# Altium PCB SWMD_21DK LV_DR_Brush_V1.0.PcbDoc
Units mil, origin at the board's own origin, x right, y up, seen from the top; angles counter-clockwise.
Board outline 4317.55 x 587.56 mil, 2 copper layers (Top, Bottom); 94 components, 64 nets, 295 pads, 188 vias.
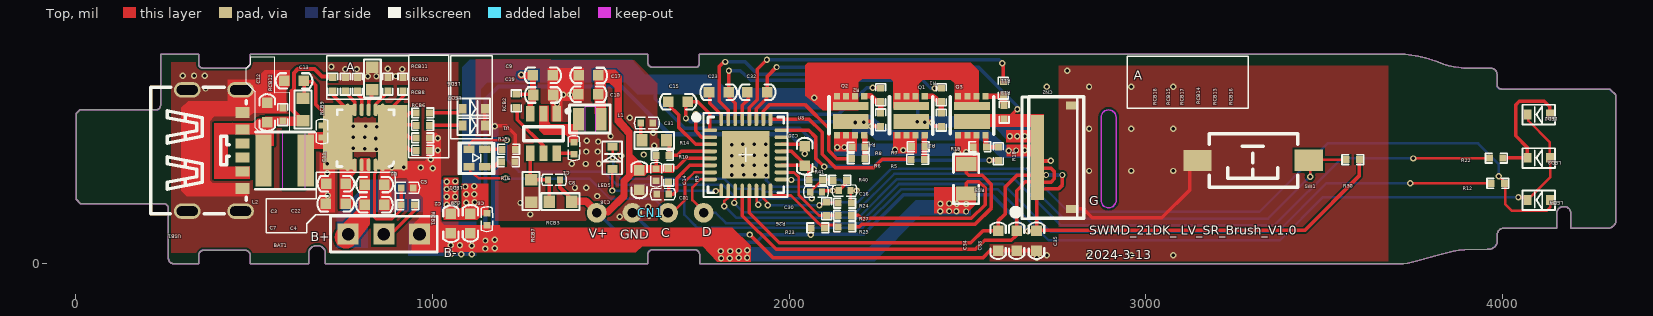
[diagram p0: Top view]
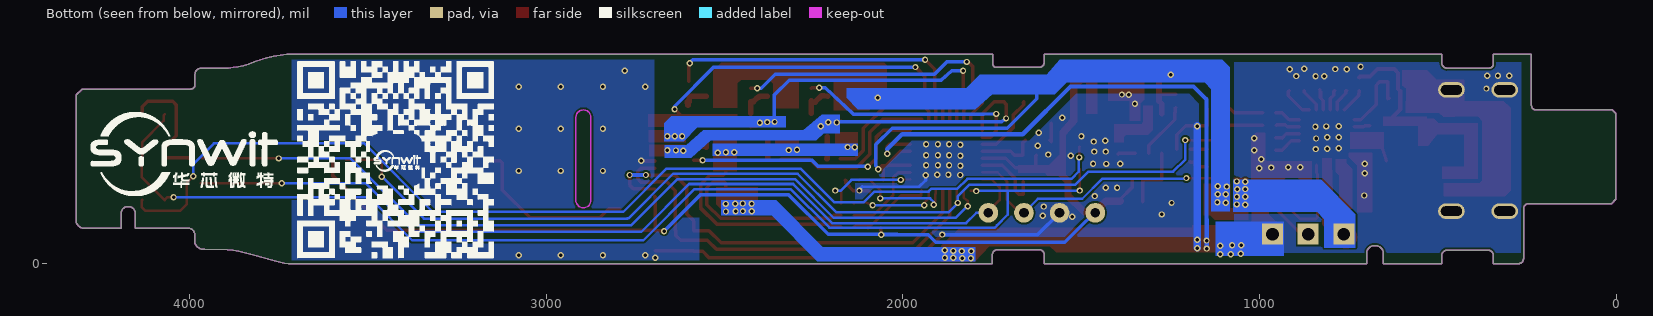
[diagram p1: Bottom view, seen from below]

## Layer stack, top to bottom
Solder Mask Top: solder mask 0.4, Solder Resist, Dk 3.5
Top: signal copper 1.4
Dielectric 1: dielectric 12.6, FR-4, Dk 4.8
Bottom: signal copper 1.4
Solder Mask Bottom: solder mask 0.4, Solder Resist, Dk 3.5

## Board outline
259.7,12.96 ccw(c274.21,12.96) 274.21,-1.55 344.28,-1.55 344.28,21.65 cw(c359.31,21.65) 359.31,36.68 472.81,36.68 cw(c472.81,19.79) 489.7,19.79 489.7,-1.55 653.45,-1.55 653.45,32.93 cw(c676.47,25.23) 699.49,32.93 699.49,-1.55 1603.35,-1.55 1603.35,22.41 cw(c1618.89,22.38) 1618.87,37.93 1734.39,37.93 cw(c1734.39,23.03) 1749.28,23.03 1749.28,-1.6 3711.58,-1.6 3711.51,-1.6 ccw(c3709.83,158.67) 3757.83,5.74 3829.49,25.32 3829.45,25.31 cw(c3926.17,-299.15) 3895.53,38.03 3958.66,39.08 3958.67,39.07 ccw(c3961.85,63.92) 3986.57,59.91 3986.58,81.37 cw(c4002.83,81.37) 4002.83,97.62 4153.24,97.62 4153.24,143.03 cw(c4172.93,138.7) 4192.62,143.03 4192.62,97.41 4297.41,97.41 4297.4,97.41 ccw(c4295.09,121.78) 4318.61,114.96 4318.61,471.84 4302.1,488.35 3997.9,488.35 cw(c3997.9,500.72) 3985.53,500.72 3985.53,530.19 ccw(c3969.35,530.19) 3969.35,546.37 3906.78,546.37 3906.8,546.37 cw(c3914.23,812.44) 3835.95,558.03 3835.91,558.05 ccw(c3695.54,238.28) 3728.45,585.95 1748.45,585.95 1748.45,560.05 cw(c1737.26,560.05) 1737.26,548.87 1618.26,548.87 cw(c1618.26,563.26) 1603.87,563.26 1603.87,585.85 489.28,585.85 489.28,562.79 cw(c473.28,562.79) 473.28,546.78 356.18,546.78 cw(c356.18,558.68) 344.28,558.68 344.28,585.95 237.41,585.95 237.41,442.2 cw(c225.33,442.2) 225.33,430.12 11.31,430.12 1.05,419.86 1.05,178.97 12.83,167.2 245.46,167.2 cw(c245.46,152.96) 259.7,152.96

## Design rules (kind name [scope] priority, off if disabled: settings)
Clearance "Clearance - Default - DEFAULT- SMD" [IsVia vs IsSMTPin] p1: gap=0 ignorepadtopadclearanceinfootprint=FALSE
Clearance "Clearance - Default - DEFAULT - Via" [IsVia vs IsVia] p2: gap=0 ignorepadtopadclearanceinfootprint=FALSE
Clearance "Clearance - Default - DEFAULT - Net" [All] p3: gap=5.51 ignorepadtopadclearanceinfootprint=FALSE except(0: Arc-Hole Track-Hole SMDPad-Hole THPad-Hole Via-Hole Fill-Hole Poly-Hole Region-Hole Text-Hole; 10: Text-Text)
ComponentClearance "ComponentClearance - Default - DEFAULT" [All] p1: gap=5.91 collisioncheckmode=3 verticalgap=10 showdistances=FALSE
FanoutControl Fanout_Small [(CompPinCount < 5)] p3: bgadir=Out bgaviamode=Centered fanoutstyle=Auto fanoutdirection=OutThenIn viagrid=1 // Fanout_Small (Default Rule)
FanoutControl Fanout_SOIC [IsSOIC] p4: bgadir=Out bgaviamode=Centered fanoutstyle=Auto fanoutdirection=Alternating viagrid=1 // Fanout_SOIC (Default Rule)
HoleToHoleClearance "HoleToHoleClearance - Default - DEFAULT" [All] p1: gap=5.91 allowstackedmicrovias=TRUE
Length "Default Length" [All] p1: maxlimit=50000 minlimit=0
MaxMinImpedance "Default Impedance" [All] p1: minimum=50.00 maximum=150.0
ParallelSegment "Default Parallel Segment Adjasent" [All] p1: limit=1000 gap=200
ParallelSegment "Default Parallel Segment Same Layer" [All] p2: limit=1000 gap=200
PlaneConnect "Default PlaneConnect" [All] p1: planeconnectstyle=Direct reliefexpansion=20 reliefentries=4 reliefconductorwidth=15 reliefairgap=10
PolygonConnect "PolygonConnect - Default SMT" [IsSMTPin] p1: connectstyle=Direct reliefconductorwidth=10 reliefentries=4 polygonreliefangle="45 Angle" airgapwidth=10
PolygonConnect "PolygonConnect - Default Pad" [All] p2: connectstyle=Direct reliefconductorwidth=15 reliefentries=4 polygonreliefangle="45 Angle" airgapwidth=10
RoomDefinition "Room: D76609048" [All vs False] p1: confinementstyle=ConfineOut formatcopy=TRUE lockcomponents=FALSE outline 2915.2,416 ccw(c2916.52,416.72) 2917.84,417.42 ccw(c2896.1,405.52) 2874.37,417.44 ccw(c2875.69,416.72) 2876.99,415.98 cw(c2896.1,405.52) 2915.2,415.99
RoomDefinition "Room: D53874403" [All vs False] p2: confinementstyle=ConfineOut formatcopy=TRUE lockcomponents=FALSE outline 2876.94,169.2 ccw(c2875.68,168.38) 2874.43,167.56 ccw(c2896.1,181.69) 2917.77,167.56 ccw(c2916.52,168.38) 2915.26,169.2 cw(c2896.1,181.69) 2876.94,169.2
RoomDefinition "Room: D33575189" [All vs False] p3: confinementstyle=ConfineOut formatcopy=TRUE lockcomponents=FALSE outline 2874.18,168.38 ccw(c2875.68,168.38) 2877.18,168.38 2877.18,416.72 ccw(c2875.68,416.72) 2874.18,416.72 2874.18,168.38
RoomDefinition "Room: D1997251" [All vs False] p4: confinementstyle=ConfineOut formatcopy=TRUE lockcomponents=FALSE outline 2915.02,168.38 ccw(c2916.52,168.38) 2918.02,168.38 2918.02,416.72 ccw(c2916.52,416.72) 2915.02,416.72 2915.02,168.38
RoutingLayers "RoutingLayers - Default - DEFAULT" [All] p1: top layer_v5=TRUE bottom layer_v5=TRUE
RoutingPriority "RoutingPriority - Default - DEFAULT" [All] p1: routingpriority=3
RoutingTopology "Default Routing Topology" [All] p1: topology=Shortest
RoutingVias "RoutingVias - Default - DEFAULT" [All] p1: holewidth=9.84 width=17.72 viastyle="Through Hole" minholewidth=9.84 minwidth=17.72 maxholewidth=9.84 maxwidth=17.72
SMDToCorner "SMDToCorner - Default - DEFAULT" [All] p1: distance=0
SolderMaskExpansion [All] p1: expansion=4 istentingtop=FALSE
Width "Default Width" [All] p1: maxlimit=78.74 minlimit=6 preferedwidth=9.84
22 further rules are at their usual default settings.

## Components (designator, comment, footprint, x,y, rotation, side; value= is the part's Value field where it differs from the comment)
BAT1 "HDR1X3" HDR1X3 963.76,81.44 r180 top
C1 "C0402" C0402 1396.85,322.44 r270 top
C01 "C0402" C0402 1646.06,193.7 r0 top
C2 "C0603" C0603 1051.97,111.02 r90 top
C3 "C0603" C0603 729.53,222.83 r0 top
C4 "C0603" C0603 837.4,163.39 r180 top
C5 "C0402" C0402 929.13,211.42 r0 top
C6 "C0402" C0402 1152.76,123.23 r270 top
C7 "C0603" C0603 728.74,166.93 r0 top
C8 "C0402" C0402 1340.94,233.86 r180 top
C9 "C0603" C0603 1309.45,526.77 r0 top
C10 "C0603" C0603 1437.01,473.62 r180 top
C11 "C0402" C0402 690.55,369.29 r270 top
C12 "C0603" C0603 536.61,422.44 r90 top
C13 "C0603" C0603 611.81,511.02 r180 top
C14 "C0402" C0402 1627.56,248.03 r270 top
C15 "C0603" C0603 1688.98,452.36 r0 top
C16 "C0402" C0402 2155.91,203.54 r0 top
C17 "C0603" C0603 1438.06,526.35 r180 top
C18 "C0603" C0603 1580.19,233.44 r270 top
C19 "C0603" C0603 1310.9,471.63 r0 top
C20 "C0603" C0603 2043.97,300.37 r90 top
C22 "C0603" C0603 837.8,220.47 r0 top
C23 "C0603" C0603 1803.15,479.13 r0 top
C29 "C0603" C0603 1106.69,111.42 r270 top
C30 "C0402" C0402 2075.98,200 r180 top
C31 "C0402" C0402 1601.18,392.91 r180 top
C32 "C0603" C0603 1911.02,479.53 r0 top
C33 "C0603" C0603 2638.19,62.99 r270 top
C34 "C0603" C0603 2586.22,62.99 r270 top
C35 "C0603" C0603 2694.09,62.99 r270 top
CN1 "XH2.54-SMD4P" XH2.54-SMD4P 1610.77,141.34 r0 top
CN2 "SMD-12" SMD-12 2696.85,404.61 r270 top
L1 "L1206A" L1206A 1409.52,403.11 r0 top
L2 "L1206" L1206 526.3,287.84 r0 top
LED1 "LED0402-4" LED0402-4 1146.77,271 r90 top
LED2 "LED0402" LED0402 4122.05,417.32 r90 top
LED3 "LED0402" LED0402 4122.1,295.5 r90 top
LED4 "LED0402" LED0402 4122.05,177.17 r90 top
LED5 "LED0402" LED0402 1504.9,275.59 r0 top
LED6 "LED0402" LED0402 1096.06,433.07 r270 top
LED7 "LED0402" LED0402 1096.06,385.83 r270 top
Q1 "DFN-3X3_8" DFN-3X3_8 2380.71,468.5 r180 top
Q2 "DFN-3X3_8" DFN-3X3_8 2211.02,468.5 r180 top
Q3 "DFN-3X3_8" DFN-3X3_8 2551.3,468.5 r180 top
R1 "LC-0402_R" LC-0402_R 2427.17,472.05 r270 top
R2 "LC-0402_R" LC-0402_R 2256.69,472.05 r270 top
R3 "LC-0402_R" LC-0402_R 2427.17,401.57 r90 top
R4 "LC-0402_R" LC-0402_R 2257.09,401.57 r270 top
R5 "LC-0402_R" LC-0402_R 2360.91,291.27 r0 top
R6 "LC-0402_R" LC-0402_R 2194.77,293.16 r0 top
R7 "LC-0402_R" LC-0402_R 2362.2,326.77 r0 top
R8 "LC-0402_R" LC-0402_R 2194.88,325.59 r0 top
R9 "LC-0402_R" LC-0402_R 1662.6,246.85 r270 top
R10 "LC-0402_R" LC-0402_R 1645.28,301.97 r0 top
R11 "LC-0402_R" LC-0402_R 2600.89,490.79 r270 top
R12 "LC-0402_R" LC-0402_R 3987.8,223.62 r180 top
R13 "LC-0402_R" LC-0402_R 2603.02,423.62 r90 top
R14 "0603-R" 0603-R 1656.69,344.49 r180 top
R15 "LC-0402_R" LC-0402_R 1213.78,319.29 r0 top
R16 "LC-0402_R" LC-0402_R 1212.99,283.86 r0 top
R18 "LC-0402_R" LC-0402_R 2587.21,307.09 r90 top
R19 "LC-0402_R" LC-0402_R 2535.43,326.43 r0 top
R22 "LC-0402_R" LC-0402_R 3983.46,294.88 r180 top
R23 "LC-0402_R" LC-0402_R 2080.71,98.82 r180 top
R24 "LC-0402_R" LC-0402_R 2156.3,168.5 r0 top
R25 "LC-0402_R" LC-0402_R 2155.91,101.97 r180 top
R26 "LC-0402_R" LC-0402_R 2105.51,152.36 r270 top
R27 "LC-0402_R" LC-0402_R 2155.91,133.86 r180 top
R30 "LC-0402_R" LC-0402_R 3580.89,290.59 r180 top
R40 "LC-0402_R" LC-0402_R 2142.52,232.28 r180 top
R41 "LC-0402_R" LC-0402_R 2074.8,233.46 r180 top
RCB1 "LC-0402_R" LC-0402_R 930.91,163.28 r0 top
RCB2 "LC-0402_R" LC-0402_R 1235.07,455.13 r270 top
RCB3 "0603R" 0603R 1359.06,172.44 r0 top
RCB6 "LC-0402_R" LC-0402_R 972.83,316.54 r0 top
RCB7 "0603R" 0603R 1276.77,202.36 r90 top
RCB8 "LC-0402_R" LC-0402_R 972.83,351.18 r0 top
RCB9 "0603R" 0603R 637.01,431.1 r270 top
RCB10 "LC-0402_R" LC-0402_R 972.44,386.61 r180 top
RCB11 "LC-0402_R" LC-0402_R 972.83,421.26 r180 top
RCB12 "LC-0402_R" LC-0402_R 580.31,416.93 r90 top
RCB13 "LC-0402_R" LC-0402_R 874.8,502.36 r90 top
RCB14 "0603R" 0603R 831.5,518.11 r90 top
RCB15 "LC-0402_R" LC-0402_R 755.91,502.36 r90 top
RCB16 "LC-0402_R" LC-0402_R 917.32,502.36 r90 top
RCB17 "LC-0402_R" LC-0402_R 789.37,502.36 r90 top
RCB18 "LC-0402_R" LC-0402_R 720.47,502.36 r90 top
RS3 "LC-0805_R" LC-0805_R 2496.85,236.22 r90 top
SW1 "SW_SMD-3_6_2.5" SW_SMD-3_6_2.5 3300.2,287.9 r180 top
U1 "LC-SOT-23-6" LC-SOT-23-6 1311.42,363.37 r90 top
U2 "QFN-24" QFN-24 888.29,303.51 r90 top
U3 "QFN32" QFN32 1878.78,303.87 r0 top
USB1 "TYPE-C-SMD_6P" TYPE-C-SMD_6P 389.6,315.9 r270 top

## Footprints (in the part's own frame and the unit in brackets; to place one, negate y for a bottom-side part, rotate by r counter-clockwise, add the part's x,y. Pads: shape width x height; smd on the part's side, far side on the other; paste and mask are expansions set on the pad)
0603-R [mm]
  rect 0.799x0.9 smd: 1(0,0) 2(1.751,0)
  silkscreen extent -0.52,-0.6 2.27,0.6
0603R [mm]
  rect 0.8x0.9 smd: 1(-0.8,0) 2(0.8,0)
  silkscreen extent -1.35,-0.6 1.35,0.6
C0402 [mm]
  rect 0.45x0.5 smd mask+0.076: 1(-0.425,0) 2(0.425,0)
  silkscreen extent -0.88,-0.4 0.88,0.4
C0603 [mm]
  rect 0.75x0.75 smd: 1(-0.7,0) 2(0.7,0)
  silkscreen extent -1.31,-0.55 1.31,0.55
DFN-3X3_8 [mil]
  rect 17x18 smd: 1(0,0) 2(25.59,0) 3(51.18,0) 4(76.77,0) 5(76.77,109.58) 6(51.18,109.58) 7(25.59,109.58) 8(0,109.58)
  rect 100x23 smd: 9(38.33,27.5)
  rect 100x42 smd: 10(38.33,70.83)
  silkscreen extent -23,2 99,106
HDR1X3 [mm]
  rect 1.5x1.5 hole 0.9: 1(0,0) 2(2.54,0) 3(5.08,0)
  silkscreen extent -1.27,-1.27 6.35,1.27
L1206 [mil]
  rect 46x147 smd: 1(0,0) 2(117.92,0)
  silkscreen extent -23,-80 143,80
L1206A [mm]
  rect 0.8x1.6 smd: 1(0,0) 2(1.6,0)
  silkscreen extent -0.63,-0.97 2.26,1.04
LC-0402_R [mm]
  rect 0.5x0.5 smd mask+0.126: 1(-0.48,0) 2(0.48,0)
  silkscreen extent -0.78,-0.35 0.77,0.35
LC-0805_R [mm]
  rect 1x1.47 smd: 1(-1.05,0) 2(1.05,0)
  silkscreen extent -1.77,-0.9 1.77,0.9
LC-SOT-23-6 [mm]
  rect 1.1x0.6 smd: 1(1.4,-0.95) 2(1.4,0) 3(1.4,0.95) 4(-1.4,0.95) 5(-1.4,0) 6(-1.4,-0.95)
  silkscreen extent -0.5,-1.87 1.72,1.4
LED0402 [mm]
  rect 0.7x0.55 smd: 1(0,-0.3) 2(0,1.3)
  silkscreen extent -0.72,-0.66 0.68,1.66
LED0402-4 [mil]
  rect 21x32 smd: 1(0,0) 2(48.33,0) 3(48.33,44.17) 4(0,44.17)
  silkscreen extent -20,-26 65,68
QFN32 [mm]
  oval 1x0.28 smd: 1(-2.55,1.75) 2(-2.55,1.25) 3(-2.55,0.75) 4(-2.55,0.25) 5(-2.55,-0.25) 6(-2.55,-0.75) 7(-2.55,-1.25) 8(-2.55,-1.75) 17(2.55,-1.75) 18(2.55,-1.25) 19(2.55,-0.75) 20(2.55,-0.25) 21(2.55,0.25) 22(2.55,0.75) 23(2.55,1.25) 24(2.55,1.75)
  oval 0.28x1 smd: 9(-1.75,-2.55) 10(-1.25,-2.55) 11(-0.75,-2.55) 12(-0.25,-2.55) 13(0.25,-2.55) 14(0.75,-2.55) 15(1.25,-2.55) 16(1.75,-2.55) 25(1.75,2.55) 26(1.25,2.55) 27(0.75,2.55) 28(0.25,2.55) 29(-0.25,2.55) 30(-0.75,2.55) 31(-1.25,2.55) 32(-1.75,2.55)
  rect 3.4x3.4 smd: 33(0,0)
  silkscreen extent -3.64,-3 2.97,2.97
QFN-24 [mil]
  rect 83x83 smd: 0(49.21,77.13) 1(0,0) 2(19.69,0) 3(39.37,0) 4(59.06,0) 5(78.74,0) 6(98.43,0) 13(98.43,154.26) 14(78.74,154.26) 15(59.06,154.26) 16(39.37,154.26) 17(19.69,154.26) 18(0,154.26)
  oval 35x12 smd: 7(126.34,27.92) 8(126.34,47.6) 9(126.34,67.29) 10(126.34,86.97) 11(126.34,106.66) 19(-27.92,126.34) 20(-27.92,106.66) 21(-27.92,86.97) 22(-27.92,67.29) 23(-27.92,47.6) 24(-27.92,27.92)
  oval 35x12.01 smd: 12(126.34,126.34)
  silkscreen extent -32,-4 127,155
SMD-12 [mil]
  rect 22x36 smd: 0(252.38,97.5) 0/2(-37.62,97.5) 1(216.54,0) 2(196.85,0) 3(177.17,0) 4(157.48,0) 5(137.8,0) 6(118.11,0) 7(98.43,0) 8(78.74,0) 9(59.06,0) 10(39.37,0) 11(19.68,0) 12(0,0)
  silkscreen extent -62,-25 279,130
SW_SMD-3_6_2.5 [mm]
  rect 2x1.5 smd: 1(-3.996,-0.02) 2(3.937,0)
  silkscreen extent -3.21,-1.9 3.09,1.9
TYPE-C-SMD_6P [mm]
  oval 1.1x1.9 hole 0.686 slot 1.499 at 90 deg: 7(-4.32,-1.963) 7/2(4.32,-1.963) 7/3(-4.32,1.838) 7/4(4.32,1.838)
  rect 0.7x1 smd paste-0.487 mask+0.051: A5(-0.5,1.963) A9(1.5,1.963) B5(0.5,1.963) B9(-1.5,1.963)
  rect 0.8x1 smd paste-0.487 mask+0.051: A12(2.7,1.963) B12(-2.7,1.963)
  silkscreen extent -4.5,-4.56 4.5,2.24
XH2.54-SMD4P [mm]
  round 1.4 hole 0.7: 1(-3.81,0) 2(-1.27,0) 3(1.27,0) 4(3.81,0)

## Via types
v1: diameter 17.72, hole 9.84, Top to Bottom, 188 vias

## Nets (pads, with @x,y where several pads share a name; then routed paths per layer and width w, separated by ;. In a path a pad name is that pad's centre, name@x,y a point inside that pad or via, vN(x,y) a via of type N, cw(c..) or ccw(c..) an arc to the next point about the centre after c; other vN are vias at no path point)
3V3: C8.1 C10.1 C14.1 C17.1 C18.1 C35.1 CN1.1 CN2.1 L1.2 R9.1 R10.1 R23.2 R30.1 RCB3.2 U3.5 | length 3105.3
  Top w9.84: C8.1 1357.68,212.2 1390.55,179.33 1390.55,173.62 RCB3.2 ; CN1.1 CN1.1@1460.77,144.09 ; R10.1 1627.56,300.79 C14.1 ; R9.1 1664.57,267.72 1685.43,267.72 1711.75,294.03 U3.5 ; v1(2061.42,79.92) R23.2 ; v1(2670.08,89.76) 2670.87,90.55 C35.1 ; CN2.1 2694.09,185.32 C35.1 ; R30.1 3599.79,245.67 3445.85,91.73 2695.28,91.73 C35.1
  Top w19.68: RCB3.2@1390.55,173.62 1431.24,173.62 1460.77,144.09 1492.91,144.09 1537.8,188.98 1537.8,230.71 1568.08,261 C18.1
  Bottom w9.84: CN1.1 1491.88,113.6 1546.43,59.06 1908.32,59.06 1929.19,79.92 v1(2061.42,79.92) 2015.55,80.71 2209.45,80.71 2320.08,191.34 2568.5,191.34 v1(2670.08,89.76)
12V: BAT1.3 C2.2 C4.2 C6.1 C9.1 C19.1 C20.1 C22.1 C29.1 Q1.2 Q1.3 Q1.4 Q1.9 Q2.2 Q2.3 Q2.4 Q2.9 Q3.2 Q3.3 Q3.4 Q3.9 R41.2 RCB2.1 U1.3 U2.21 U2.22 U3.19 U3.21 | length 1034.4
  Top w9.84: RCB2.1 1280.94,474.03 1281.89,473.07 C19.1 ; C19.1@1281.89,463.4 C19.1@1281.89,468.11 ; U3.19 2042.43,274.34 C20.1 ; U3.21 2007.15,313.71 2043.97,276.9 C20.1 ; R41.2 2055.91,266.14 C20.1@2049.24,272.81 ; v1(2069.69,262.99) 2059.87,272.81 C20.1@2049.24,272.81 ; 2069.69,509.84 2070.87,511.02 ; C20.1 C20.1@2049.24,272.81
  Top w15.75: U1.3 1274.02,446.46 1281.89,454.33 C19.1@1281.89,463.4 ; C19.1@1281.89,468.11 1281.89,473.07 C9.1
  Top w19.68: v1@1248.03,526.77 C9.1
  Bottom w9.84: 1625.2,500.79 1625.2,461.42 1707.87,378.74 2029.92,378.74 2075.98,332.68 2075.98,272.83 2069.69,266.54 v1(2069.69,262.99)
  Bottom w19.68: v1@1248.03,526.77 v1@1248.03,527.56
  other v1: 1040.16,163.39 1064.17,164.57 1095.28,169.29 1118.11,170.87 1040.16,186.22 1063.39,186.61 1094.49,193.31 1117.72,192.91 1062.99,207.09 1039.76,207.87 1092.13,214.96 1117.72,215.75 1040.16,228.74 1064.17,229.13 2070.87,464.17 1248.82,528.35
$$$1: BAT1.2 RCB1.2 | length 131.6
  Top w9.84: BAT1.2 883.07,81.44 953.21,151.57 953.21,159.88 RCB1.2
$$$2: C11.1 U2.14 | length 45
  Top w9.84: C11.1 703.54,386.02 707.28,382.28 733.99,382.28 U2.14
$$$3: RCB16.1 U2.7 | length 90.2
  Top w9.84: U2.7 877.56,429.85 878.02,430.31 880.31,430.31 919.29,469.29 919.29,481.5 RCB16.1
$$$4: RCB13.1 U2.8 | length 67.9
  Top w9.84: U2.8 840.68,446.06 874.8,479.53 RCB13.1
$$$5: RCB14.1 U2.9 | length 60.6
  Top w9.84: U2.9 821,455.51 829.13,463.65 829.13,481.1 RCB14.1
$$$6: RCB17.1 U2.10 | length 58.8
  Top w9.84: RCB17.1 791.73,481.89 791.73,471.39 801.31,461.81 U2.10
$$$7: RCB15.1 U2.11 | length 65.3
  Top w9.84: RCB15.1 758.4,482.94 758.4,476.38 781.63,453.15 U2.11
$$$8: RCB11.2 U2.6 | length 73.7
  Top w9.84: U2.6 917.32,401.93 936.65,421.26 RCB11.2
$$$9: RCB6.1 U2.3 | length 76.6
  Top w9.84: U2.3 911.02,342.88 937.01,316.89 953.58,316.89 RCB6.1
$$$10: RCB8.1 U2.4 | length 71
  Top w9.84: U2.4 924.8,362.56 937.01,350.36 937.83,351.18 RCB8.1
$$$15: LED6.1 RCB11.1 | length 97.4
  Top w9.84: RCB11.1 1070.11,421.26 1080.58,431.73 1083.03,431.73 LED6.1
$$$16: C11.2 L2.2 U2.15 U2.16 U2.17 | length 74.7
  Top w9.84: L2.2 667.84,358.66
$$$17: C3.2 C7.2 U2.19 U2.20
$$$18: C5.1 RCB1.1 U2.23 | length 301
  Top w7.87: U2.23 840.68,253.54 837.4,250.26 837.4,128.35 842.13,123.62 885.83,123.62 910.24,148.03 910.24,164.76 RCB1.1@912.02,166.54
  Top w9.84: RCB1.1 912.02,166.54 912.02,211.03 C5.1
$$$19: C13.1 RCB9.1 U2.13 | length 220.6
  Top w9.84: RCB9.1 638.58,462.6 640.16,461.02 640.16,508.27 663.78,508.27 673.23,498.82 673.23,444.85 716.14,401.93 U2.13
$$$20: RCB18.1 U2.12 | length 70.5
  Top w9.84: RCB18.1 721.29,470.5 U2.12
$$$25: LED7.1 RCB10.1 | length 93.2
  Top w9.84: RCB10.1 1083.46,386.61 LED7.1
$$$26: RCB10.2 U2.5 | length 68.7
  Top w9.84: U2.5 922.05,382.25 928.38,388.58 951.57,388.58 RCB10.2
$$$27: C1.1 L1.1 U1.2
$$$28: C1.2 U1.6 | length 49.1
  Top w9.84: U1.6 1394.31,308.25 C1.2
$$$29: RCB2.2 U1.5 | length 159.6
  Top w9.84: RCB2.2 1237.14,434.16 1237.14,422.83 1237.72,422.26 1237.72,402.55 1311.42,328.85 U1.5
$$$32: Q1.8 R5.2 R7.2 | length 68
  Top w15.75: R5.2 2379.8,358.02 Q1.8
$$$33: Q1.1 R1.2 R3.2 | length 84.5
  Top w15.75: Q1.1 2394.65,468.54 cw(c2394.71,446.33) 2410.41,462.03 2419.01,453.43 2420.88,453.43 R1.2 2427.33,420.71 R3.2
$$$34: Q2.1 R2.2 R4.1 | length 89.3
  Top w15.75: Q2.1 2221.74,469.5 2228.53,469.5 2246.46,451.57 R2.2@2257.04,451.57 ; R2.2 2257.04,454.67 R2.2@2257.04,451.57 ; R4.1 R2.2@2257.04,451.57
$$$35: Q2.8 R6.2 R8.2 | length 62.3
  Top w15.75: Q2.8@2212.6,354.4 2212.6,293.16 R6.2
$$$36: Q3.1 R11.2 R13.2 | length 79.4
  Top w15.75: Q3.1 2599.61,468.5 2599.61,452.94 2604.59,452.94 R13.2
$$$37: Q3.8 R18.2 R19.2 | length 73.5
  Top w11.81: R19.2 2551.3,324.81 2554.38,324.91 R18.2
  Top w15.75: R19.2@2551.3,324.81 Q3.8
$$$41: LED2.1 LED3.2 R22.1 | length 359.2
  Top w9.84: R22.1 4002.98,295.5 LED3.2 4070.92,324.02 4037.8,357.14 4037.8,443.7 4048.43,454.33 4118.5,454.33 4133.86,438.98 LED2.1
$$$6693: C8.2 RCB3.1 RCB7.2 U1.4 | length 187.9
  Top w9.84: U1.4 1274.02,233.46 1274.41,233.86 C8.2 1327.56,230.51 RCB3.1
$$$7682: R10.2 R14.1 U3.4 | length 165.4
  Top w9.84: R14.1 1664.17,338.98 R10.2 1686.22,301.97 1697.97,313.71 U3.4
$$$7757: C31.2 R14.2 | length 56.4
  Top w9.84: C31.2 1584.45,341.17 R14.2
$$$15432: LED1.2 R15.1 | length 48.1
  Top w9.84: LED1.2 1194.84,319.33 R15.1
$$$15550: LED1.1 R16.1 | length 52.7
  Top w9.84: LED1.1 1174.02,271 1186.61,283.6 1193.83,283.6 R16.1
$$$27947: LED4.1 LED5.2 R12.1 | length 3062
  Top w7.09: LED5.2 1505.51,326.16 v1(1505.51,296.46) ; v1(3990.16,243.7) 4006.69,227.17 R12.1 4008.27,222.05 4008.27,165.35 4026.38,147.24 4125.2,147.24 4135.43,157.48 4135.43,175.59 LED4.1
  Bottom w7.09: v1(1505.51,296.46) 1507.09,294.88 1507.09,257.09 1527.56,236.61 1819.69,236.61 1848.03,208.27 1920.87,208.27 1928.35,200.79 2079.92,200.79 2110.24,170.47 2192.13,170.47 2287.01,265.35 2662.99,265.35 2784.25,144.09 3318.9,144.09 3510.63,335.83 3932.68,335.83 3990.16,278.35 v1(3990.16,243.7)
BST1: C15.1 U3.3 | length 191.6
  Top w9.84: C15.1 1662.42,450.04 1661.42,449.04 1661.42,444.49 1690.12,415.78 1690.12,381.46 1738.19,333.4 U3.3
BST2: C23.1 U3.32 | length 89.1
  Top w9.84: C23.1 1777.95,476.77 1777.95,448.46 1809.88,416.54 U3.32
BST3: C32.1 U3.29 | length 82.6
  Top w9.84: U3.29 1868.94,442.91 1885.04,459.02 1885.04,477.95 C32.1
BUTTON: LED1.3 R30.2 SW1.1 U3.11 | length 2841.8
  Top w7.09: LED1.3 1103.05,319.33 1103.88,318.5 1103.88,334.59 1114.57,345.28 v1(1208.27,345.28) ; v1(1846.06,168.9) 1846.06,175.58 1849.21,179.52 1849.21,200.45 U3.11 ; v1(3461.42,242.52) 3461.42,284.78 SW1.1 3459.42,290.59 R30.2
  Bottom w7.09: v1(1208.27,345.28) 1208.27,290.94 1242.52,256.69 1480.31,256.69 1516.54,220.47 1813.39,220.47 1846.06,187.8 v1(1846.06,168.9) 1872.83,142.13 2186.61,142.13 2295.28,250.79 2644.49,250.79 2769.69,125.59 2773.23,125.59 2773.62,125.2 3343.31,125.2 3461.02,242.91 3461.22,243.11 3461.42,242.91 v1(3461.42,242.52)
COM: Q1.5 Q1.6 Q1.7 Q2.5 Q2.6 Q2.7 Q3.5 Q3.6 Q3.7 R7.1 R8.1 R19.1 R25.1 RS3.2 | length 588.9
  Top w9.84: R25.1 2196.85,101.97 2203.54,108.66 2521.65,108.66 2567.72,154.72 2567.72,220.08 2541.73,246.06 2504.33,246.06 2496.85,253.54 RS3.2
  other v1: 2519.69,309.84 2473.62,311.42 2496.46,310.63 2320.08,317.32 2297.24,318.11 2135.04,324.8 2155.51,325.59
DC-ADC: C30.2 R40.2 R41.1 U3.14 | length 304.7
  Top w7.09: U3.14 1907.48,202.65 1907.48,194.88 1909.8,192.57 1909.8,171.99 1912.34,169.44 1912.34,167.61 1913.39,166.57 v1(1913.39,163.78) ; v1(2063.78,181.5) 2063.78,198.23 C30.2 2092.72,233.46 2122.44,233.46 R40.2
  Bottom w7.09: v1(1913.39,163.78) 1913.77,164.07 1913.77,171.25 1924.02,181.5 v1(2063.78,181.5)
GND: BAT1.1 C01.1 C2.1 C3.1 C4.1 C5.2 C6.2 C7.1 C9.2 C10.2 C12.2 C13.2 C14.2 C16.1 C17.2 C18.2 C19.2 C20.2 C22.2 C29.2 C30.1 C31.1 C33.2 C34.2 C35.2 CN1.2 CN2.0 CN2.0/2 CN2.6 LED6.2 LED7.2 R15.2 R16.2 R27.1 R40.1 RCB6.2 RCB7.1 RCB8.2 RCB12.2 RCB13.2 RCB14.2 RCB15.2 RCB16.2 RCB17.2 RS3.1 SW1.2 U1.1 U2.0 U2.18 U2.24 U3.22 U3.33 USB1.7 USB1.7/2 USB1.7/3 USB1.7/4 USB1.A12 USB1.B12 | length 4626.4
  Top w9.84: LED6.2 LED7.2 1207.09,385.83 1232.68,360.24 R15.2 ; v1(1890.16,80.31) 1955.12,15.35 2544.09,15.35 2561.81,33.07 2587.4,33.07 2587.99,33.66 2589.76,35.43 C33.2 C35.2 ; v1(1936.61,246.46) U3.33@1938.98,246.46 ; U3.22 2038.49,333.4 C20.2 2044.09,327.8 v1(2044.09,307.09) ; C30.1 2096.26,203.54 v1(2122.05,203.54) C16.1 2159.84,224.21 2159.84,230.71 R40.1 ; R27.1 2194.49,133.86 2202.76,125.59 2511.42,125.59 2550,164.17 2550,211.02 2532.28,228.74 2501.97,228.74 2497.24,224.02 RS3.1@2497.24,198.82 ; CN2.6 2735.71,286.5 v1@2735.83,286.61 ; CN2.0 2825.59,152.23 2850.66,127.17 3045.67,127.17 3123.62,205.12 3123.62,281.1 3130.42,287.9 SW1.2
  Bottom w7.87: 1936.61,232.28 1954.72,214.17 2114.17,214.17
  Bottom w9.84: CN1.2 1621.79,80.31 v1(1890.16,80.31) ; 1936.61,232.28 v1(1936.61,246.46) ; v1(2044.09,307.09) 2044.09,319.69 ; 2114.17,214.17 2122.05,206.3 v1(2122.05,203.54)
  Bottom w11.81: v1(1148.03,40.94) 1148.03,123.23 1148.82,124.02 ; v1(1148.82,63.39) 1148.82,124.02 ; 2044.09,319.69 2002.36,361.42 1664.17,361.42 1529.92,495.67 1185.04,495.67 1148.82,459.45 1148.82,124.02
  Bottom w19.68: v1(1174.8,42.13) v1(1174.8,65.75) v1@1174.8,385.83
  other v1: 1809.45,13.39 1833.86,13.39 1859.06,14.96 1882.28,15.35 2694.49,14.96 2723.23,22.34 2841.34,22.34 2959.45,22.34 3077.56,22.34 1080.71,24.8 1110.63,24.8 1053.15,25.98 1808.66,33.86 1835.04,33.86 1859.45,34.25 1883.07,36.22 1110.24,48.82 1051.18,50 1077.17,50.39 1525.59,130.31 1607.87,132.68 1274.41,136.61 2496.46,144.88 2424.41,145.67 2448.82,146.06 2469.69,145.67 1605.12,158.66 2496.85,166.14 2424.8,166.93 2449.21,167.32 2470.08,166.93 1246.85,168.9 1461.81,188.19 706.3,189.76 1399.61,211.81 1431.5,211.81 1839.76,247.24 1872.44,247.64 1903.94,247.64 705.12,251.97 2841.34,258.56 2959.45,258.56 3077.56,258.56 1001.18,266.14 967.32,268.11 886.22,269.29 919.69,269.29 1838.98,273.62 1870.87,274.41 1901.97,274.8 1935.43,274.8 1430.31,278.35 704.72,278.74 1390.55,279.13 1466.93,279.13 2734.25,287.4 995.67,291.73 1529.13,301.57 1838.98,301.57 1870.87,302.36 1901.97,302.76 1935.43,302.76 1592.91,304.72 1431.5,312.99 1463.78,312.99 1014.57,316.93 810.24,320.47 842.13,320.08 777.95,322.05 1622.44,329.13 1838.98,332.28 1870.87,333.07 1901.97,333.46 1935.43,333.46 1464.96,340.94 1432.68,343.31 841.73,349.61 1014.57,350.39 778.35,353.54 810.24,353.54 1499.61,356.3 1619.29,365.35 2841.34,376.67 2959.45,376.67 3077.56,376.67 812.6,383.46 843.31,382.68 778.35,383.86 1175.2,384.25 1553.54,407.87 1349.61,447.24 1366.54,472.44 1385.83,472.83 363.78,489.76 2723.23,494.78 2841.34,494.78 2959.45,494.78 3077.56,494.78 818.5,524.41 842.91,524.41 299.61,525.2 331.5,525.2 361.42,525.2 896.85,524.8 2779.92,539.37 755.91,544.09 787.4,544.49 915.75,544.09 874.41,544.88 716.93,550.79
HALLA: C33.1 CN2.3 CN2.5 U3.12 | length 1216.8
  Top w9.84: U3.12 1868.94,133.43 1963.78,38.58 2522.83,38.58 2548.43,64.17 2623.62,64.17 2636.61,77.17 2636.61,88.98 C33.1 2638.19,203.54 2662.6,227.95 2701.85,227.95 CN2.3@2702.36,227.44 ; CN2.3 CN2.3@2702.36,227.44 ; CN2.5 2733.97,266.81 2743.7,257.09 2743.7,236.22 2734.93,227.44 CN2.3@2702.36,227.44
HALLB: C34.1 CN2.2 CN2.4 U3.13 | length 1217.6
  Top w9.84: U3.13 1888.62,140.91 1972.44,57.09 2509.84,57.09 2544.09,91.34 2585.43,91.34 C34.1 2586.22,118.11 2607.09,138.98 2607.09,213.78 2640.44,247.13 CN2.4 v1(2720.87,247.24) ; CN2.2 2719.65,208.01 2755.64,208.01 2766.93,219.29 v1(2766.93,247.24)
  Bottom w9.84: v1(2720.87,247.24) v1(2766.93,247.24)
LED3: LED2.2 LED3.1 LED4.2 LED5.1 U3.9 | length 3271.8
  Top w7.09: v1(1504.72,203.54) 1504.72,257.3 LED5.1 ; v1(1794.88,202.36) 1796,203.48 U3.9 ; v1(4045.67,185.04) 4062.99,185.04 LED4.2 4135.43,241.73 4135.43,293.98 LED3.1 4133.91,338.92 4073.23,399.61 4073.23,414.96 LED2.2
  Bottom w7.09: v1(1504.72,203.54) 1706.69,203.54 ; v1(1794.88,202.36) 1794.88,198.43 1793.38,201.67 1792.52,203.54 1706.69,203.54 ; v1(4045.67,185.04) 3497.24,185.04 3376.38,64.17 2727.95,64.17 2584.25,207.87 2314.96,207.87 2206.69,99.61 1742.13,99.61 1736.81,104.92 1736.81,105.71 1706.69,135.83 1706.69,203.54
LED4: R22.2 U3.10 | length 2386.4
  Top w7.09: v1(1818.11,159.84) 1818.11,174.72 1829.57,183.43 U3.10 ; v1(3750.79,293.7) 3964.57,293.7 R22.2
  Bottom w7.09: v1(1818.11,159.84) 1819.69,159.84 1852.76,126.77 2194.09,126.77 2303.15,235.83 2632.28,235.83 2761.42,106.69 3361.42,106.69 3549.61,293.7 v1(3750.79,293.7)
OC: C16.2 R24.2 U3.17 | length 279.4
  Top w7.09: U3.17 v1(2006.69,233.46) ; C16.2 C16.2@2174.02,203.54 ; R24.2 2173.43,168.5 2172.64,167.72 2172.64,201.97 2173.42,202.76 2174.02,203.35 C16.2@2174.02,203.54 ; v1(2189.76,203.54) C16.2@2174.02,203.54
  Bottom w7.09: v1(2006.69,233.46) 2144.49,233.46 2174.41,203.54 v1(2189.76,203.54)
OPA1+: R23.1 R25.2 U3.16 | length 251.6
  Top w7.87: U3.16 1949.21,193.31 1949.21,189.76 2005.36,189.76 2081.66,113.46 2088.78,106.94 ; R23.1 2097.64,98.82 2088.78,106.94 ; R25.2 2136.22,102.76 2135.14,103.11 2133.85,103.94 2130.84,106.94 2088.78,106.94
OPA1-: R26.2 R27.2 U3.18 | length 237.7
  Top w7.87: U3.18 2013.85,254.66 2027.17,241.34 2027.17,190.94 2084.25,133.86 2096.46,133.86 2096.85,133.46 R26.2 2105.91,133.86 R27.2
OPA1-OUT: R24.1 R26.1 U3.15 | length 251.2
  Top w7.09: U3.15 1927.99,181.85 1935.31,174.69 1940.16,169.92 v1(1940.16,162.2) ; v1(2085.43,162.2) 2105.89,170.31 R26.1@2108.03,171.17 ; R26.1 R26.1@2108.03,171.17 ; R24.1 2137.01,170.08 R26.1@2109.82,171.1 ; R26.1@2108.03,171.17 R26.1@2109.82,171.1 ; R26.1@2108.03,171.17 2109.27,171.65 R26.1@2109.82,171.1
  Bottom w7.09: v1(1940.16,162.2) v1(2085.43,162.2)
RST: C01.2 R9.2 U3.6 | length 203.2
  Top w9.84: R9.2 1662.8,227.76 C01.2 1675.2,193.7 1685.04,203.54 1685.04,237.4 1721.98,274.34 U3.6
SWCLK: CN1.3 LED1.4 U3.7 | length 816.9
  Top w7.09: LED1.4 1105.51,268.09 1105.51,257.09 1129.85,238.58 v1(1205.12,238.58) ; CN1.3 1663.13,136.22 1667.39,136.22 1708.33,177.17 1708.33,228.74 1734.25,254.66 U3.7
  Bottom w7.09: v1(1205.12,238.58) 1206.44,237.26 1440.28,237.26 1497.23,180.71 1621.4,180.71 CN1.3
SWDIO: CN1.4 R12.2 U3.8 | length 2521.4
  Top w7.09: CN1.4 1761.16,144.42 1728.81,176.77 1728.81,212.66 1751.12,234.97 U3.8 ; v1(3742.13,224.41) 3968.5,224.41 R12.2
  Bottom w7.09: CN1.4 1794.09,141.34 1822.83,112.6 2198.82,112.6 2308.27,222.05 2600,222.05 2733.86,88.19 3371.26,88.19 3507.09,224.41 v1(3742.13,224.41)
U: C15.2 CN2.7 CN2.8 Q2.10 R4.2 U3.1 | length 743.9
  Top w9.84: v1(1711.02,405.91) 1711.02,445.29 1713.37,447.64 1715.68,451.09 C15.2 1716.93,452.76 1743.7,452.76 1777.95,418.5 1777.95,373.62 1778.39,373.19 U3.1 ; Q2.10 2225.98,397.67 2241.34,382.32 2256.73,382.32 R4.2
  Bottom w9.84: v1(1711.02,405.91) 1723.23,396.85 v1@2190.94,396.85
  other v1: 2616.14,315.35 2636.61,316.14 2660.63,316.54 2230.71,383.86 2185.43,394.49 2209.84,394.88
U-H: R2.1 U3.2 | length 642.8
  Top w9.84: v1(1738.58,418.5) 1738.58,370.8 1754.72,353.08 U3.2 ; v1(2235.04,491.73) 2255.91,491.73 R2.1
  Bottom w9.84: v1(1738.58,418.5) 1774.02,417.99 2139.29,417.99 2140.15,418.84 2218.5,491.73 v1(2235.04,491.73)
U-L: R6.1 U3.26 | length 377.1
  Top w9.84: U3.26 1927.99,426.34 1946.5,444.84 2044.7,444.84 2111,378.54 2111,316.01 2133.86,293.16 R6.1
V: C23.2 CN2.9 CN2.10 Q1.10 R3.1 U3.30 | length 891.4
  Top w9.84: v1(1831.5,539.37) 1830.71,538.58 C23.2 1830.35,478.78 1830.35,466.93 1849.25,448.03 U3.30 ; Q1.10 2360.63,397.67 2360.63,394.88 Q1.10@2381.5,394.88 ; Q1.10@2383.46,394.88 2383.46,397.67 2396.06,397.67 v1@2400.41,393.32 ; v1(2401.18,394.09) v1@2400.41,393.32 ; R3.1 2425.95,383.89 2409.84,383.89 v1@2400.41,393.32
  Bottom w9.84: v1(1831.5,539.37) 1863.78,539.37 1893.15,513.39 2318.9,513.39 2360.43,471.85 2360.43,396.26 v1(2360.24,396.06) ; v1@2381.5,394.88 2383.46,394.88 2383.46,394.09 v1(2401.18,394.09)
  other v1: 2619.69,355.51 2639.76,355.91 2660.63,355.91 2380.71,395.67
V-H: R1.1 U3.31 | length 816.1
  Top w9.84: v1(1821.26,564.17) 1816.93,564.17 1804.33,551.57 1804.33,454.37 1829.57,429.13 U3.31 ; v1(2408.66,490.94) R1.1
  Bottom w9.84: v1(1821.26,564.17) 1877.17,564.17 1911.81,529.53 2358.66,529.53 2397.24,490.94 v1(2408.66,490.94)
V-L: R5.1 U3.25 | length 497.3
  Top w9.84: U3.25 2055.58,404.27 2092.91,366.93 2092.91,305.51 2131.5,266.93 2236.61,266.93 2261.02,291.34 2341.94,291.34 R5.1
VIN: C12.1 L2.1 RCB9.2 RCB12.1 RCB18.2 USB1.A9 USB1.B9 | length 272.6
  Top w11.81: RCB9.2 605.51,431.1 605.51,482.68 611.42,488.58 611.42,533.46 622.44,544.49 668.9,544.49 690.16,523.23 718.5,523.23 RCB18.2
W: C32.2 CN2.11 CN2.12 Q3.10 R13.1 U3.27 | length 970.2
  Top w9.84: U3.27 1908.31,433.07 1937.4,462.17 1937.4,478.35 C32.2 1938.58,523.62 v1(1964.96,550) ; 2586.61,409.84 2603.02,409.84 2615.75,409.84 ; 2622.83,409.84 2618.9,409.84 ; v1(2640.55,431.5) 2618.9,409.84 ; 2615.75,409.84 2618.9,409.84 ; 2615.75,409.84 2617.32,408.27 2618.9,409.84
  Bottom w9.84: v1(1964.96,550) 2530.71,550 2640.55,440.16 v1(2640.55,431.5)
W-H: R11.1 U3.28 | length 904.5
  Top w9.84: U3.28 1888.62,436.26 1911.02,458.66 1911.02,544.09 1937.4,570.47 v1(1938.19,570.47) ; v1(2597.64,560.63) 2600.89,557.38 R11.1
  Bottom w9.84: v1(1938.19,570.47) 2589.37,570.47 2597.64,563.78 v1(2597.64,560.63)
W-L: R18.1 U3.24 | length 693.9
  Top w9.84: U3.24 2055.51,372.77 2074.41,353.87 2074.41,294.49 v1(2098.82,270.08) ; v1(2562.2,288.98) 2569.29,287.01 2570.48,288.19 R18.1
  Bottom w9.84: v1(2098.82,270.08) 2101.18,272.44 2238.58,272.44 2255.12,288.98 v1(2562.2,288.98)
pads on no net: U2.1 U2.2 U3.20 U3.23 USB1.A5 USB1.B5

## Polygon pours and split planes (outlines as drawn)
GND on Top "Top-GND" (solid, remove dead copper, pour order 6): 1332.28,571.26 1332.28,568.5 1565.75,568.5 1630.31,503.94 1630.31,352.36 1661.81,320.87 1794.49,320.87 1794.49,119.29 1176.38,119.29 1176.38,258.66 1121.65,313.39 1121.65,571.26
GND on Top "Top-GND 1" (solid, remove dead copper, pour order 2): 2757.09,553.15 2757.09,58.66 2563.39,58.66 2563.39,3.94 3680.31,3.94 3680.31,553.15
GND on Top "Top-GND 2" (solid, remove dead copper, pour order 0): 267.72,563.39 1072.05,563.39 1072.05,29.13 267.72,29.13
GND on Bottom "Bottom-GND" (solid, remove dead copper, pour order 10): 2697.64,570.08 2697.64,127.17 2570.87,127.17 2570.87,7.48 3714.57,7.48 3714.57,570.08
GND on Bottom "Bottom-GND 1" (solid, remove dead copper, pour order 8): 266.54,563.39 1070.87,563.39 1070.87,29.13 266.54,29.13
GND on Bottom "Bottom-GND 2" (solid, remove dead copper, pour order 4): 1197.64,475.2 1514.57,475.2 1646.06,343.7 1975.59,343.7 2085.43,233.86 2133.46,233.86 2133.46,74.41 1170.08,74.41 1170.08,447.64

## Keep-outs
Top:
  region: 1428.74,439.37 1456.3,439.37 1456.3,365.75 1428.74,365.75 1428.74,439.37
  region: 578.35,368.5 578.35,208.27 643.31,208.27 643.31,368.5 578.35,368.5
Keep-Out Layer:
  lines w3.94: 2875,176.17 ccw(c2896.3,176.69) 2917.33,173.24 ; 2875,176.18 2875,409.45 cw(c2896.16,408.65) 2917.32,409.47 2917.32,173.23 ; 3711.51,-1.6 ccw(c3709.83,158.67) 3757.77,5.72 ; 3711.58,-1.6 1749.28,-1.6 1749.28,23.03 ccw(c1734.39,23.03) 1734.39,37.93 1618.87,37.93 ccw(c1618.89,22.38) 1603.35,22.41 1603.35,-1.55 699.49,-1.55 699.49,32.93 ccw(c676.47,25.23) 653.45,32.93 653.45,-1.55 489.7,-1.55 489.7,19.79 ccw(c472.81,19.79) 472.81,36.68 359.31,36.68 ccw(c359.31,21.65) 344.28,21.65 344.28,-1.55 274.21,-1.55 cw(c274.21,12.96) 259.7,12.96 259.7,152.96 ccw(c245.46,152.96) 245.46,167.2 12.83,167.2 1.05,178.97 1.05,419.86 11.31,430.12 225.33,430.12 ccw(c225.33,442.2) 237.41,442.2 237.41,585.95 344.28,585.95 344.28,558.68 ccw(c356.18,558.68) 356.18,546.78 473.28,546.78 ccw(c473.28,562.79) 489.28,562.79 489.28,585.85 1603.87,585.85 1603.87,563.26 ccw(c1618.26,563.26) 1618.26,548.87 1737.26,548.87 ccw(c1737.26,560.05) 1748.45,560.05 1748.45,585.95 3728.45,585.95 ; 3728.4,585.95 cw(c3695.54,238.28) 3835.91,558.05 ; 3757.83,5.74 3829.49,25.32 ; 3829.45,25.31 cw(c3926.17,-299.15) 3895.49,38.03 ; 3895.53,38.03 3958.66,39.08 ; 3958.67,39.07 ccw(c3961.85,63.92) 3986.58,59.92 ; 3986.57,59.91 3986.58,81.37 cw(c4002.83,81.37) 4002.83,97.62 4153.24,97.62 4153.24,143.03 cw(c4172.93,138.7) 4192.62,143.03 4192.62,97.41 4297.41,97.41 ccw(c4295.09,121.78) 4318.6,114.95 4318.61,471.84 4302.1,488.35 3997.9,488.35 cw(c3997.9,500.72) 3985.53,500.72 3985.53,530.19 ccw(c3969.35,530.19) 3969.35,546.37 3906.78,546.37 cw(c3914.23,812.44) 3835.96,558.03 ; 3835.95,558.03 3835.95,558.03

## Other copper
Top:
  region net VIN: 530.71,411.02 653.15,411.02 653.15,385.43 530.71,385.43 530.71,411.02
  region net GND: 1120.08,100 1840.55,100 1892.13,48.43 1892.13,4.33 1798.43,4.33 1757.87,47.64 1587.8,47.64 1570.87,30.71 1120.08,30.71 1120.08,100
  region net $$$27: 1299.61,440.94 1299.61,373.23 1312.2,360.63 1374.41,360.63 1381.5,353.54 1381.5,338.58 1407.48,338.58 1407.48,390.16 1331.89,390.16 1325.98,396.06 1325.98,440.94 1299.61,440.94
  region net GND: 1323.62,546.46 1323.62,458.27 1334.65,447.24 1334.65,399.61 1364.17,399.61 1364.17,455.12 1424.41,455.12 1424.41,546.46 1323.62,546.46
  region net 12V: 1031.1,240.16 1031.1,122.44 1126.38,122.44 1138.58,134.65 1157.09,134.65 1157.09,222.05 1082.68,222.05 1082.68,153.54 1072.05,153.54 1072.05,240.16 1031.1,240.16
  region net 3V3: 1454.72,542.91 1454.72,418.9 1486.22,416.93 1486.22,505.91 1496.46,505.91 1510.63,491.73 1510.63,395.27 1544.09,359.05 1544.09,245.28 1595.28,245.28 1603.15,253.15 1676.38,253.15 1676.38,275.2 1591.34,275.2 1560.63,305.91 1560.63,371.29 1530.71,404.76 1530.71,524.02 1512.2,542.52 1485.83,542.52 1485.83,542.91 1454.72,542.91
  region net GND: 853.15,285.83 853.15,146.46 884.25,146.46 884.25,230.71 892.52,238.98 926.38,238.98 934.25,231.1 934.25,205.51 941.73,198.03 959.84,198.03 974.02,183.86 974.02,137.8 941.34,105.12 941.34,31.5 1205.12,31.5 1188.58,106.3 1142.52,106.3 1127.56,105.91 1033.07,105.91 1022.05,116.93 1022.05,223.23 1022.83,222.44 1022.83,353.94 1010.63,366.14 983.86,366.14 983.86,291.34 978.35,285.83 853.15,285.83
  region net GND: 425.59,514.17 503.54,514.17 529.92,540.55 599.21,540.55 599.21,497.64 588.98,488.98 588.98,430.31 425.59,430.31 425.59,514.17
  region net $$$17: 757.09,291.73 757.09,281.1 740.55,264.57 740.55,152.36 776.77,152.36 776.77,245.28 785.83,254.33 785.83,291.73 757.09,291.73
  region net GND: 683.46,309.45 749.21,309.45 749.21,297.24 725.59,273.62 725.59,142.52 683.46,142.52 683.46,309.45
  region net GND: 2407.09,213.39 2523.23,213.39 2523.23,164.96 2498.82,140.55 2407.09,140.55 2407.09,213.39
  region net V: 2609.06,372.44 2712.99,372.44 2712.99,339.37 2609.06,339.37 2609.06,372.44
  region net COM: 2292.13,366.93 2292.13,307.87 2357.87,307.87 2357.87,366.93 2292.13,366.93
  region net $$$16: 652.36,366.54 745.67,366.54 745.67,320.47 652.36,320.47 652.36,366.54
  region net 12V: 823.97,293.53 797.99,293.93 797.24,283.46 793.7,153.54 734.52,94.6 730.04,88.76 726.88,81.13 725.8,72.95 726.88,64.77 730.04,57.14 735.06,50.59 741.61,45.57 749.23,42.41 757.42,41.34 765.6,42.41 773.22,45.57 776.41,48.02 776.4,48.01 812.62,93.68 824.41,108.44 824.41,265.75 823.97,293.53
  region net U: 2610.24,332.68 2711.02,332.68 2711.02,299.21 2610.24,299.21 2610.24,332.68
  region net W: 2465.35,417.72 2714.17,417.72 2714.17,383.07 2465.35,383.07 2465.35,417.72
  region net GND: 451.97,410.63 484.25,410.63 498.03,421.65 589.37,421.65 589.37,454.72 314.57,454.72 295.67,435.83 295.67,202.76 310.63,187.8 483.46,187.8 483.46,224.8 383.46,224.8 375.2,233.07 375.2,398.43 388.58,411.81 451.97,411.81 451.97,410.63
  region net VIN: 388.58,392.52 498.43,392.52 498.43,362.2 425.98,362.2 425.98,269.69 488.19,269.69 488.19,237.01 388.58,237.01 388.58,392.52
  region net COM: 2465.75,367.72 2465.75,258.27 2532.28,258.27 2532.28,367.72 2465.75,367.72
  region net 12V: 2045.28,470.08 2045.28,554.72 2053.15,562.6 2509.84,562.6 2532.68,539.76 2532.68,435.83 2464.17,435.83 2464.17,504.33 2453.94,514.57 2375.2,514.57 2363.39,502.76 2363.39,435.04 2292.13,435.04 2292.13,510.63 2285.04,517.72 2204.72,517.72 2194.09,507.09 2194.09,429.53 2094.49,429.53 2072.44,448.03 2045.28,470.08
  region net COM: 2127.17,367.72 2127.17,314.17 2190.55,314.17 2190.55,367.72 2127.17,367.72
  region net VIN: 438.58,393.31 497.64,392.13 510.24,404.72 555.51,404.72 555.51,329.92 526.38,329.92 501.57,361.81 438.58,361.81 438.58,393.31
Bottom:
  region net GND: 1797.24,45.28 2224.8,45.28 2355.91,176.38 2509.06,176.38 2509.06,133.86 2367.72,133.86 2239.76,5.91 1797.24,5.91 1797.24,45.28
  region net COM: 2126.38,334.25 2533.86,334.25 2533.86,300.79 2126.38,300.79 2126.38,334.25
  region net GND: 931.89,116.14 1122.44,116.14 1122.44,20.87 931.89,20.87 931.89,116.14
  region net 12V: 1084.25,146.06 1084.25,550 1104.72,570.47 1560.98,570.47 1597.24,528.74 1785.04,528.74 1822.83,490.94 2158.27,490.94 2158.27,463.39 2127.17,432.28 1798.03,432.28 1749.21,473.62 1574.41,473.62 1541.34,507.09 1154.33,507.09 1135.04,487.8 1135.04,146.06 1084.25,146.06
  region net 12V: 731.1,43.7 731.1,137.8 827.17,233.86 1073.62,233.86 1073.62,143.7 838.58,143.7 818.5,123.62 818.5,43.7 731.1,43.7
  region net U: 2176.77,416.54 2228.35,416.54 2280.31,372.05 2560.76,372.05 2607.62,331.1 2667.72,331.1 2667.72,295.28 2593.31,295.28 2538.98,344.88 2243.7,344.88 2222.83,365.03 2176.77,364.88 2176.77,416.54
  region net V: 2329.13,411.81 2650,411.81 2668.9,392.91 2668.9,342.13 2614.57,342.13 2576.77,381.1 2329.13,381.1 2329.13,411.81

## Silkscreen, mask and mechanical layers (free items; w line width, h text height)
Silkscreen Top:
  circle w30: c2635.68,142.97 r2.92
  lines w1.97: 2666.54,266.93 2667.72,267.72 ; 478.35,505.91 503.15,481.1 503.15,379.92 514.57,368.5 600.39,368.5 600.39,478.93 557.87,478.53 557.87,579.53 490.94,579.53 490.94,559.45 478.35,546.85 478.35,505.91
  lines w3.94: 533.46,84.65 647.64,84.65 647.64,110.63 672.44,135.43 895.28,135.43 895.28,254.33 673.62,254.33 673.62,180.31 533.46,180.31 533.46,84.65 ; 704.33,459.45 933.86,459.45 933.86,581.89 704.33,581.89 704.33,459.45 ; 934.25,295.67 1046.06,295.67 1046.06,582.68 934.25,582.68 934.25,295.67 ; 2948.03,433.86 3288.19,433.86 3288.19,579.92 2948.03,579.92 2948.03,433.86
  lines w4.72: 1051.57,349.21 1051.57,581.5 1167.72,581.5 1167.72,349.21 1051.57,349.21
  lines w7.87: 1074.02,251.3 1167.56,251.3 1167.56,337.13 1074.02,337.13 1074.02,251.3 ; 2653.6,124.75 2653.6,466 2808.18,466 2808.18,124.75 2653.6,124.75
  text "A" at 757.87,537.4 h25.59
  text "A" at 2966.54,514.57 h25.59
  text "G" at 2842.13,162.6 h25.59
  text "SWMD_21DK_ LV_SR_Brush_V1.0" at 2841.73,79.13 h25.59
  text "D" at 1756.69,75.59 h25.59
  text "C" at 1642.13,72.83 h25.59
  text "V+" at 1438.19,71.26 h25.59
  text "GND" at 1527.17,68.9 h25.59
  text "B+" at 659.06,61.42 h25.59
  text "B-" at 1031.1,16.93 h25.59
  text "2024-3-13" at 2834.25,11.42 h25.59
Silkscreen Bottom:
  drawing of 17432 lines, arcs and shapes, not listed
Paste Mask Top:
  lines w0.1: 296.59,124.17 296.59,167.48 328.08,167.48 328.08,124.17 296.59,124.17 ; 296.59,464.32 296.59,507.63 328.08,507.63 328.08,464.32 296.59,464.32 ; 446.2,124.17 446.2,167.48 477.69,167.48 477.69,124.17 446.2,124.17 ; 446.2,464.32 446.2,507.63 477.69,507.63 477.69,464.32 446.2,464.32 ; 447.18,193.85 447.18,225.35 486.55,225.35 486.55,193.85 447.18,193.85 ; 447.18,243.06 447.18,270.62 486.55,270.62 486.55,243.06 447.18,243.06 ; 447.18,282.43 447.18,309.99 486.55,309.99 486.55,282.43 447.18,282.43 ; 447.18,321.81 447.18,349.36 486.55,349.36 486.55,321.81 447.18,321.81 ; 447.18,361.17 447.18,388.73 486.55,388.73 486.55,361.17 447.18,361.17 ; 447.18,406.44 447.18,437.94 486.55,437.94 486.55,406.44 447.18,406.44